# EAGLE board relay_pcb1 (EAGLE 7.2.0)
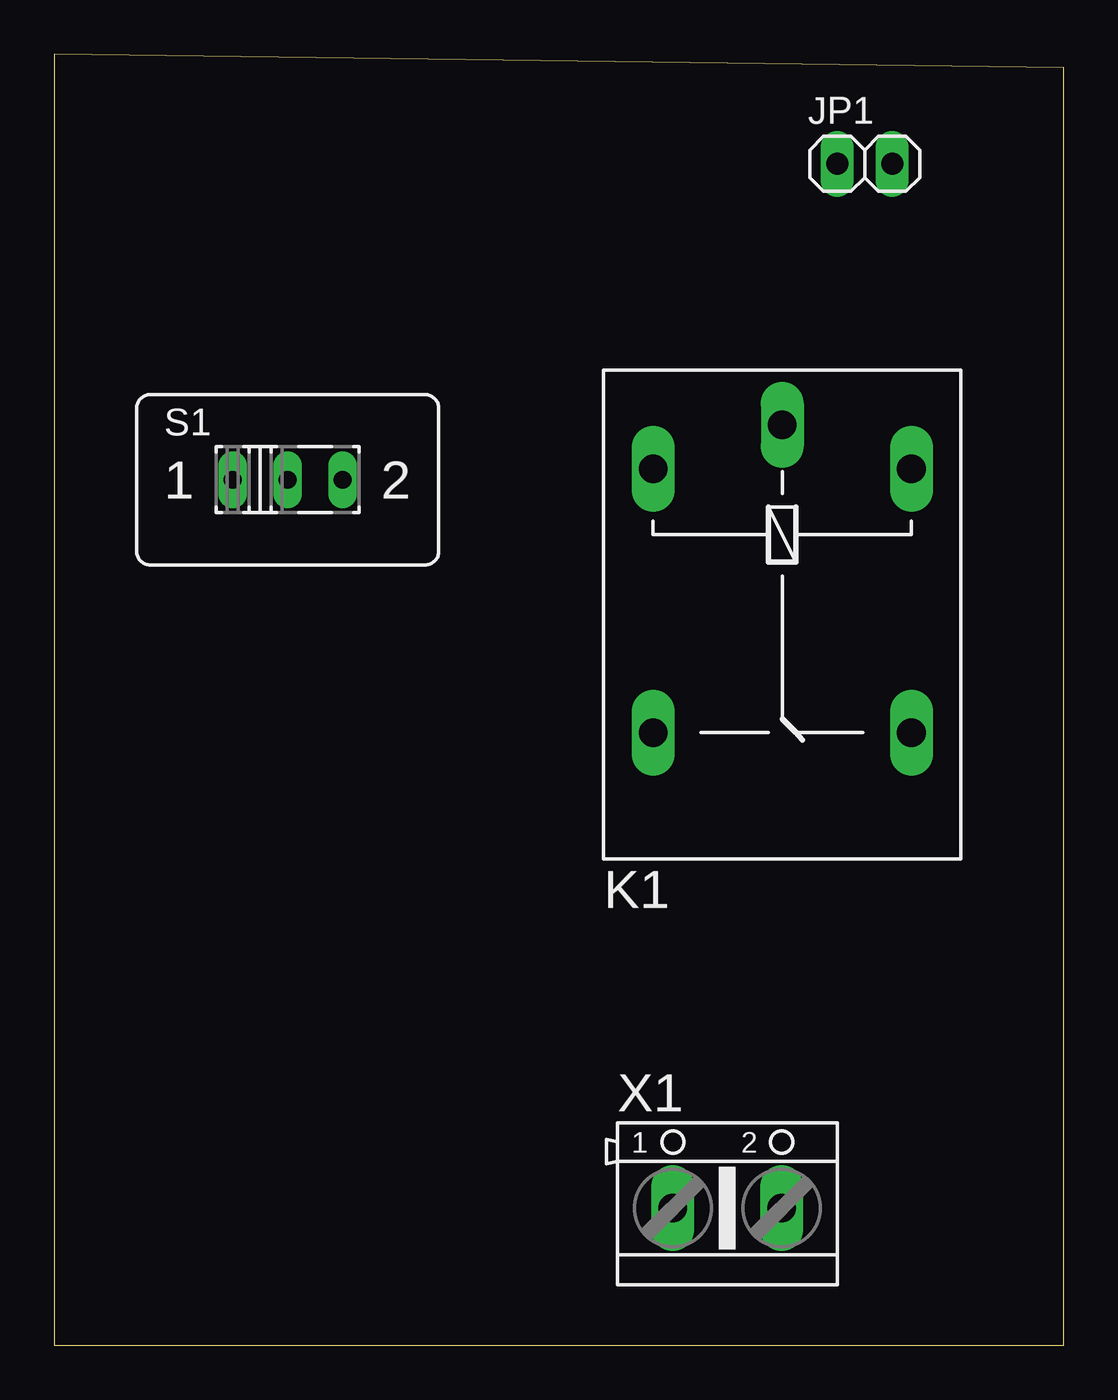
[diagram p0: board, top side]
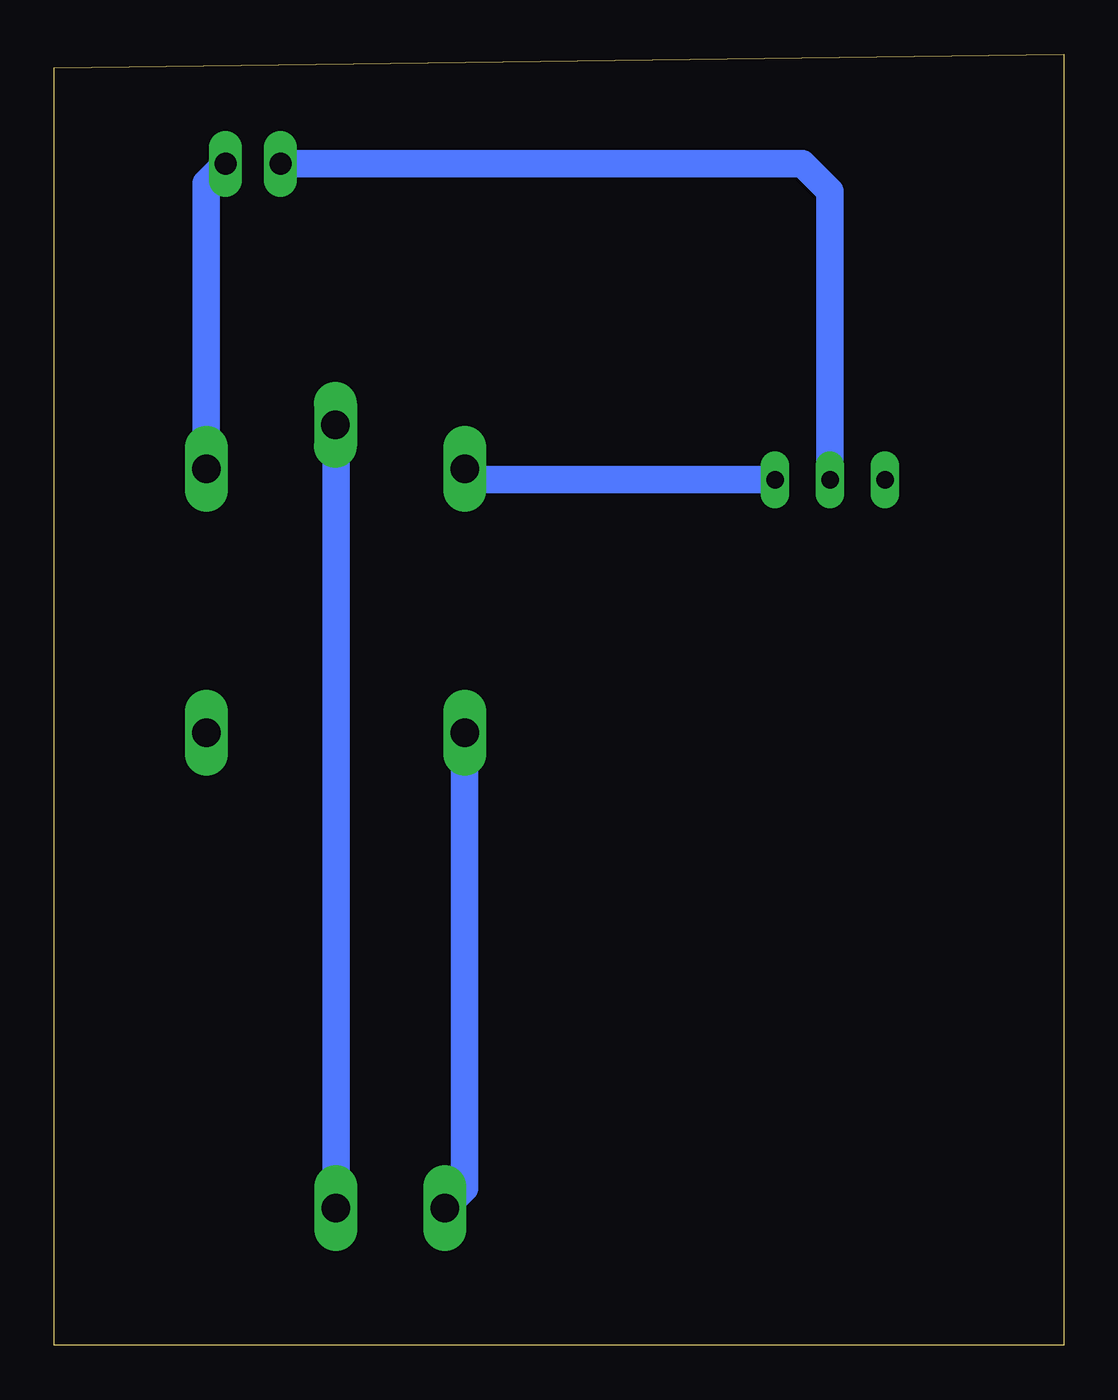
[diagram p1: board, bottom side, seen from below]

Size 46.66 x 59.68 mm. Coordinates in mm from the lower left corner, seen from the top.
Outline: 0,0 46.66,0 46.66,59.04 0,59.68 0,0
Copper layers (1*16): Top 0.035mm / dielectric 1.5mm / Bottom 0.035mm
Design rules "default": minimum track width 10mil, minimum drill 24mil, track to track 8mil, track to pad 8mil, pad to pad 8mil, via to via 8mil, smd to smd 8mil, copper to edge 40mil, drill to drill 8mil, minimum pad ring 10mil, minimum via ring 8mil, stop-mask expansion 4mil, vias tented up to drill 0mil, thermal gap 10mil

## Footprints (pad centres in the part's own frame; a part is rotated, then mirrored left to right if it is on the bottom)
1X02 = drill 1.016 long: 1 -1.27,0; 2 1.27,0
G5LE = drill 1.321 long: 1 -7.493,-5.969; 2 -7.493,5.969; O 4.699,5.969; P -9.525,0; S 4.699,-5.969
M251 = drill 0.813 long: 1 -2.54,0; 2 0,0; 3 2.54,0
AK500/2 = drill 1.321 long: 1 -2.515,0; 2 2.515,0

## Placement (x,y rotation side)
JP1  [1X02]  37.47,54.61 0 top
K1  G5LE  [G5LE]  33.66,33.02 270 top
S1  [M251]  10.79,40 0 top
X1  [AK500/2]  31.12,6.35 0 top

## Library data of the parts
JP1 = pinhead
K1 = relay; OC_FARNELL: unknown; OC_NEWARK: unknown
S1 = switch
X1 = con-ptr500; OC_FARNELL: unknown; OC_NEWARK: unknown

## Nets
0V: JP1.1 S1.2
+5V: JP1.2 K1.2
N$1: K1.1 S1.3
N$2: K1.P X1.2
N$3: K1.S X1.1

## Tracks (layer width: path | path; a pad name or v marks a point on that pad's centre or on a via)
0V
  Bottom 1.27: JP1.1 12.06,54.61 10.79,53.34 S1.2
+5V
  Bottom 1.27: K1.2 39.62,53.72 JP1.2
N$1
  Bottom 1.27: S1.3 27.18,40 K1.1
N$2
  Bottom 1.27: X1.2 33.63,42.52 K1.P
N$3
  Bottom 1.27: K1.S 27.69,7.26 X1.1